# Altium PCB GY-G11.PCBDOC (part 3 of 7)
Units mm, origin at the board's own origin, x right, y up, seen from the top; angles counter-clockwise.
Board outline 170.4 x 114.15 mm, 2 copper layers (Top Layer, Bottom Layer); 364 components, 260 nets, 1285 pads, 753 vias.
Unrouted connection lines stored in the file: 2.
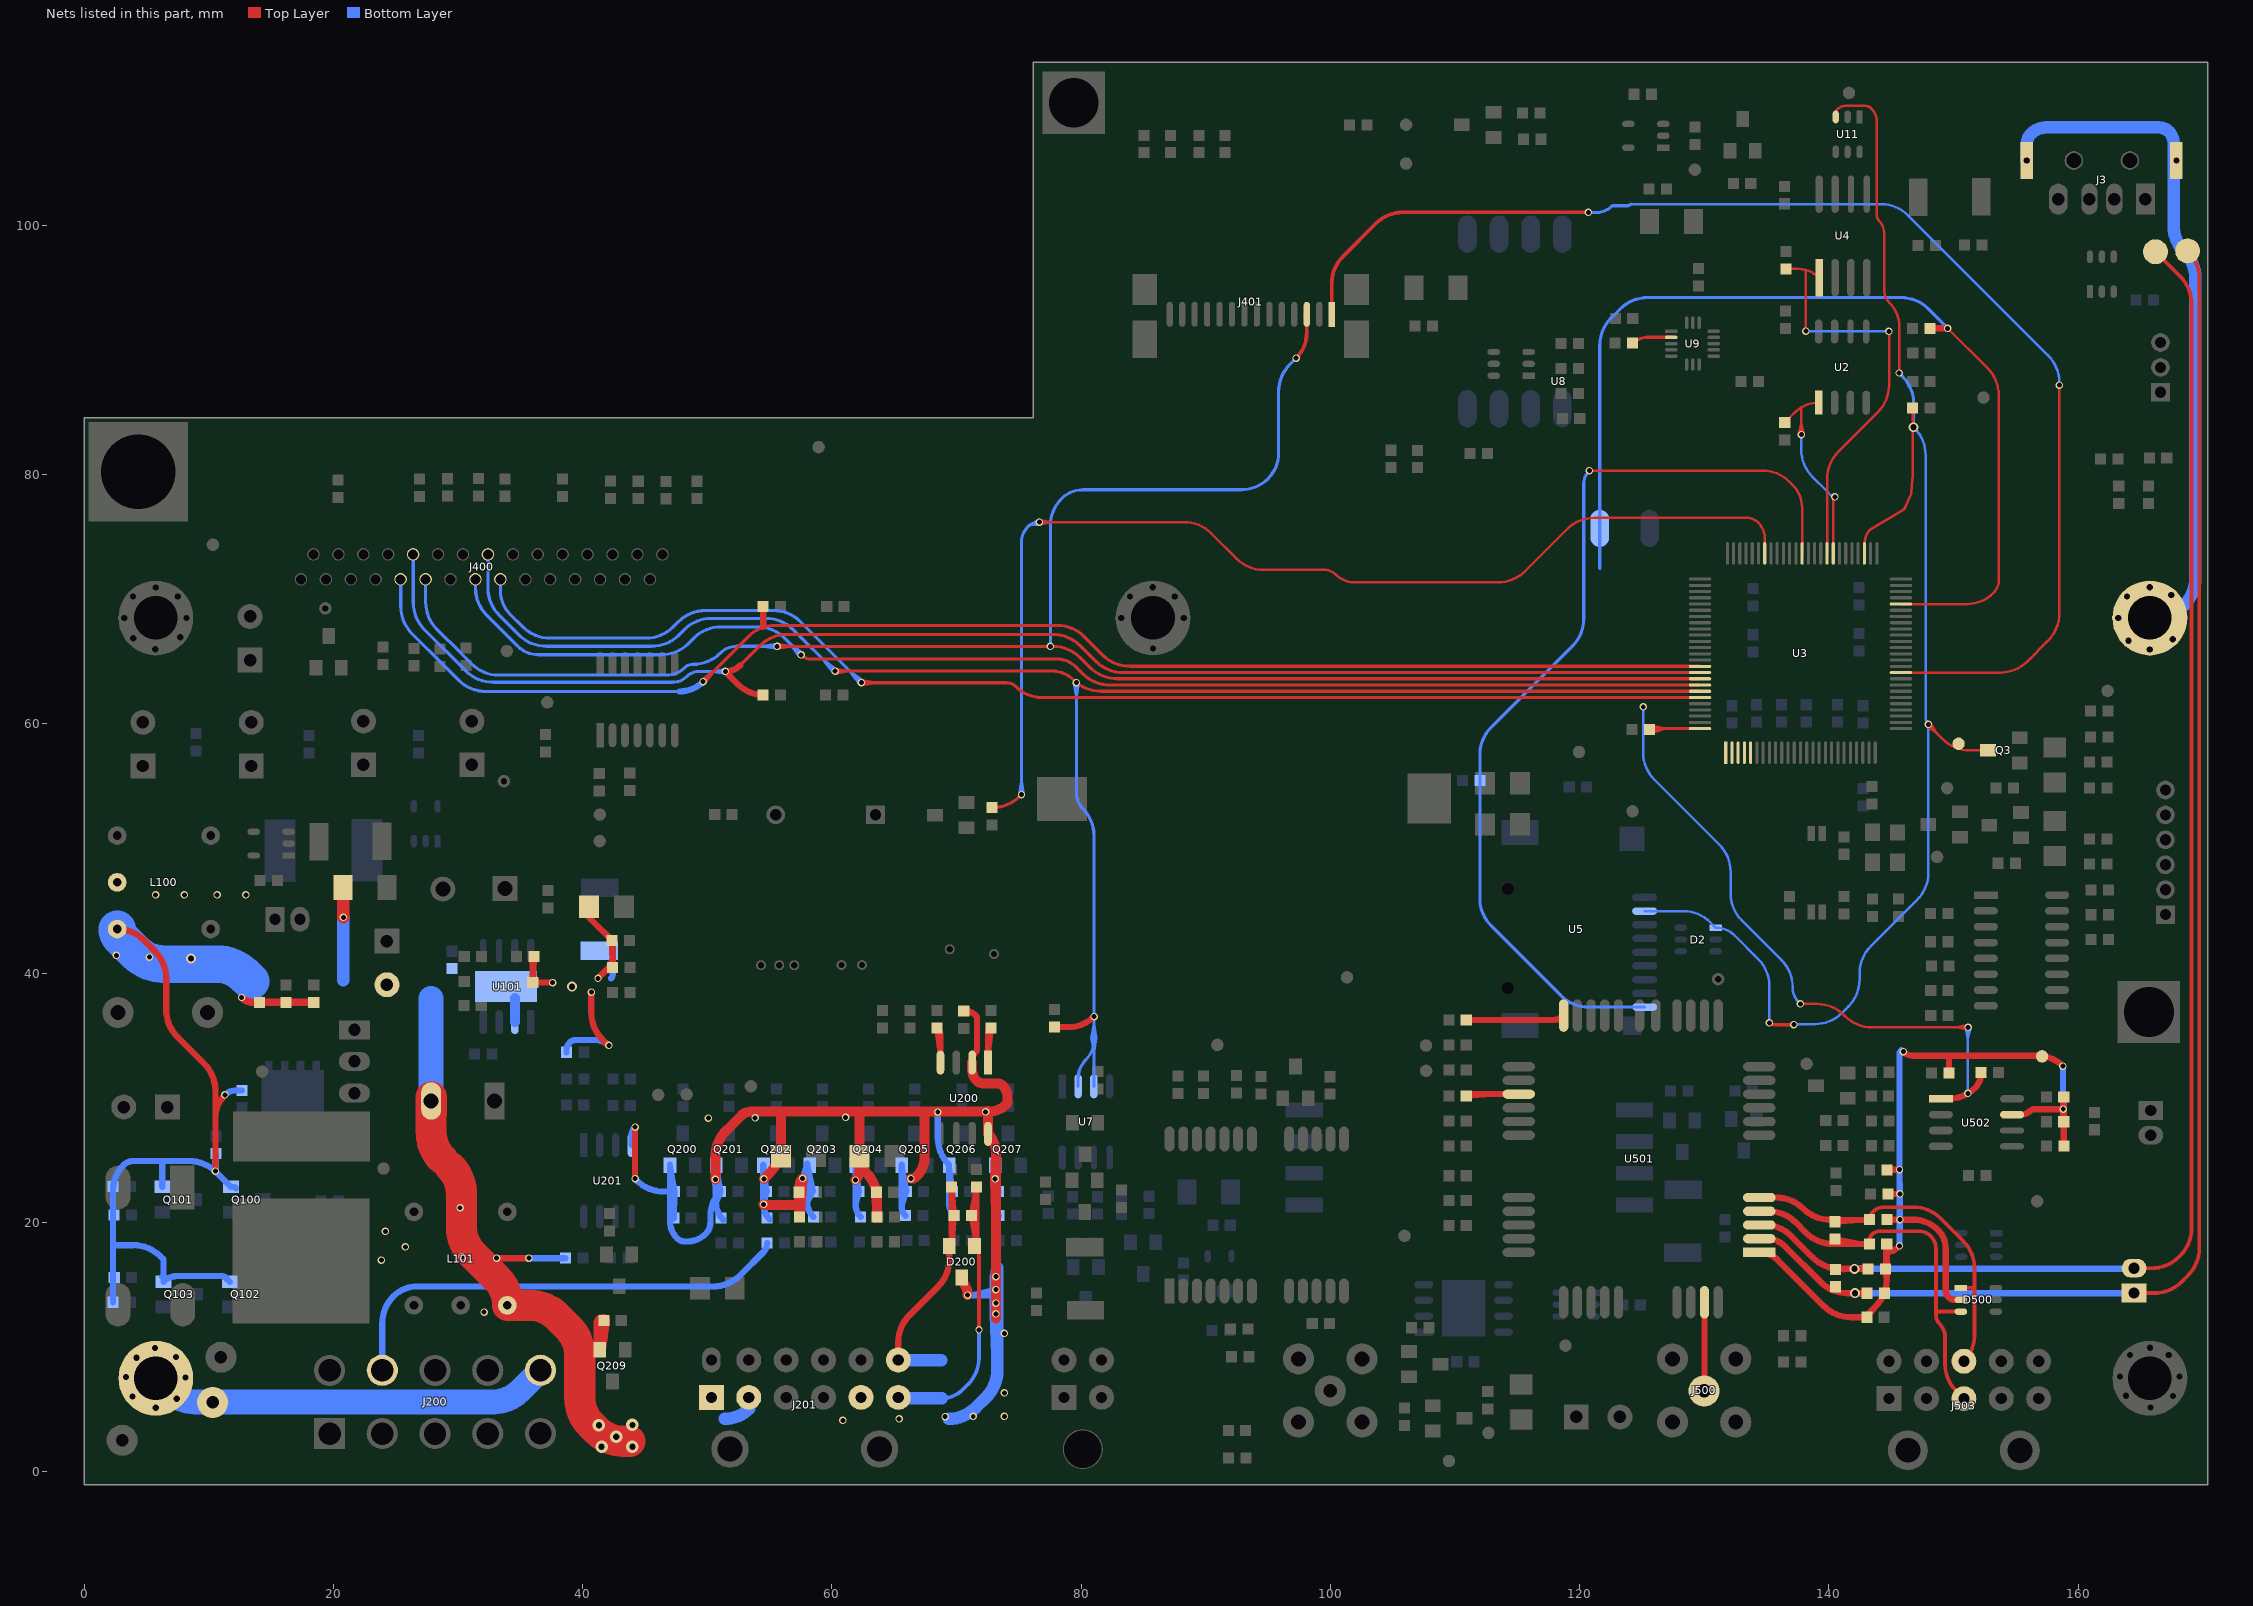
[diagram p3: the nets of this part, all layers, seen from the top]

## Via types
v1: diameter 0.6, hole 0.4, Top Layer to Bottom Layer, 620 vias
v2: diameter 0.8, hole 0.5, Top Layer to Bottom Layer, 121 vias
v3: diameter 1, hole 0.5, Top Layer to Bottom Layer, 10 vias
v4: diameter 1.27, hole 0.711, Top Layer to Bottom Layer, 2 vias

## Nets (pads, with @x,y where several pads share a name; then routed paths per layer and width w, separated by ;. In a path a pad name is that pad's centre, name@x,y a point inside that pad or via, vN(x,y) a via of type N, cw(c..) or ccw(c..) an arc to the next point about the centre after c; other vN are vias at no path point) (continued)
AGND: C101.1 C102.2 C103.2 C104.2 C105.2 C106.2 C116.1 C117.2 C119.2 C121.2 C200.2 C201.2 C202.2 C203.2 C204.2 C205.2 C206.2 C207.2 C208.2 C209.2 C210.2 D100.1 D200.3 D201.1 D202.1 D203.1 J201.1 J201.3 J201.9 L100.2 L100.5 L101.2 Q100.2 Q101.2 Q102.2 Q103.2 Q200.2 Q201.2 Q202.2 Q203.2 Q204.2 Q205.2 Q206.2 Q207.2 Q209.2 R100.1 R107.1 R109.1 R114.1 R115.1 R116.1 R117.1 R206.2 R223.1 R224.1 R225.1 R226.1 R227.1 R228.1 R229.1 R230.1 R231.1 R232.1 R233.1 R241.1 R242.2 U101.0 U101.2 U200.2 U200.8 U201.4 | length 500.8
  Top Layer w0.5: L100.2@2.648,43.544 cw(c2.648,40.558) 4.76,42.669 5.681,41.748 cw(c3.513,39.58) 6.579,39.58 6.579,37.06 ccw(c9.645,37.06) 7.477,34.892 9.631,32.738 cw(c7.463,30.57) 10.529,30.57 v1(10.529,24.11) ; 10.529,28.395 cw(c13.124,28.395) v1(11.289,30.23) ; 28.38,25.72 cw(c28.667,25.433) 28.667,25.839 ; 32.36,17.08 cw(c32.481,16.959) 32.481,17.13 v1(35.68,17.13) ; R107.1@35.994,39.387 R100.1@36.094,41.346 ccw(c36.335,41.105) 35.994,41.105 R107.1@35.994,39.246 ; R100.1@36.086,41.189 R107.1@35.994,39.246 ; v1@37.57,39.246 R107.1@35.994,39.246 ; v1(37.58,39.25) R107.1@35.994,39.246 ; D201.1@40.5,45.322 40.5,44.483 42.406,42.578 42.406,41.46 cw(c40.709,41.46) 41.909,40.26 v1(41.229,39.58) ; v1(40.689,38.48) 40.689,36.84 ccw(c43.755,36.84) 41.587,34.672 42.023,34.235 ccw(c42.109,34.321) v1(42.109,34.2) ; 40.856,44.128 C200.2@42.361,42.622 R224.1@42.406,40.676 ; C200.2@42.366,42.398 R224.1@42.406,40.454 ; v1(44.199,23.51) v1(44.199,27.64) ; C116.1@70.578,36.958 70.699,36.958 cw(c70.699,35.769) 71.54,36.61 cw(c71.274,36.344) 71.561,36.587 cw(c71.274,36.344) 71.65,36.344 71.65,33.954 cw(c71.206,33.954) 71.52,33.64 ccw(c72.174,32.986) 71.249,32.986 U200.2@71.249,32.823
  Top Layer w0.6: v1(12.64,38.05) ccw(c13.578,38.988) 13.578,37.661 18.375,37.661 cw(c18.375,37.594) C101.1@18.422,37.642 ; C101.1@18.422,37.642 C106.2@16.178,37.661 C101.1@18.422,37.642
  Top Layer w0.8: v1(50.64,23.45) 50.64,25.22 cw(c53.706,25.22) 51.538,27.388 52.74,28.59 cw(c53.473,27.857) 53.473,28.894 72.603,28.894 ccw(c72.603,30.827) 73.97,29.46 ccw(c73.729,29.701) 74.07,29.701 74.07,30.149 ccw(c72.909,30.149) 73.73,30.97 ccw(c73.32,30.56) 73.705,30.993 ccw(c73.32,30.56) 73.32,31.14 72.246,31.14 cw(c72.246,32.096) 71.57,31.42 cw(c72.345,32.195) 71.249,32.195 U200.2@71.249,32.823 ; v1(54.53,23.49) 55.002,23.962 ccw(c52.834,26.13) D203.1@55.9,26.13 ; D203.1@55.9,25.322 55.9,28.87 cw(c55.933,28.87) 55.91,28.894 ; 57.216,21.4 v1(54.51,21.45) ccw(c54.631,21.571) 54.631,21.4 57.406,21.4 ; v1@57.62,23.294 R227.1@57.406,20.454 ; v1(61.89,23.39) ccw(c61.141,24.139) 62.2,24.139 62.2,28.822 cw(c62.301,28.822) 62.23,28.894 ; D202.1@62.2,24.56 62.708,24.052 cw(c60.54,21.884) 63.606,21.884 ; 65.787,28.894 v1(68.49,28.85) 71.193,28.894 ; v1(66.34,23.51) ccw(c66.34,24.162) 66.801,23.701 ccw(c65.282,25.22) 67.43,25.22 67.43,28.894 ; D200.3@70.45,15.26 cw(c69.388,14.198) v1@70.89,14.198 ; v1@72.5,28.94 cw(c72.454,28.894) 72.519,28.894 U200.8@72.519,27.108 cw(c70.972,25.561) 73.16,25.561 ; v1(73.16,12.66) 73.16,12.348 ; v1@73.16,12.96 v1(73.16,15.66) ; v1(73.16,13.52) 73.16,12.348 ; v1(73.16,14.61) 73.16,12.348 ; 73.16,20.784 v1(73.096,23.49) 73.16,25.561 ; 73.18,12.3 cw(c73.228,12.348) 73.16,12.348 ; C202.2@57.361,22.422 R227.1@57.406,20.454 ; C202.2@57.361,22.422 57.406,22.965 ; C202.2@57.361,22.422 v1(57.64,23.53) ; C202.2@57.361,22.422 57.406,20.763 v1(57.64,23.53) ; C202.2@57.361,22.422 v1(57.64,23.53) ; C202.2@57.361,22.422 R227.1@57.406,20.454 ; C202.2@57.361,22.422 57.406,22.965 ; R227.1@57.406,20.454 57.406,22.965 ; 57.406,22.965 cw(c58.205,22.965) v1(57.64,23.53) ; 57.406,22.965 v1(57.64,23.53) ; 63.606,21.884 C201.2@63.561,22.422 R226.1@63.606,20.454 63.606,21.884 ; 73.16,12.348 73.16,25.561
  Top Layer w1: v1@20.786,44.513 C117.2@20.786,46.878 v1(20.8,44.48) ; R206.2@41.46,12.12 ccw(c41.665,11.915) 41.375,11.915 Q209.2@41.375,9.789 R206.2@41.697,12.146
  Top Layer w2: 28.738,25.082 29.372,24.448 ; L101.2@33.956,13.348 L101.2@33.99,13.36
  Top Layer w2.5: C119.2@27.849,30.07 27.848,29.75 27.84,27.25 ccw(c30.906,27.25) 28.738,25.082 ; 29.372,24.448 cw(c27.204,22.28) 30.27,22.28 30.27,19.62 ccw(c33.336,19.62) 31.168,17.452 33.092,15.528 cw(c30.924,13.36) L101.2@33.99,13.36 ; L101.2@33.956,13.348 35.772,13.348 cw(c35.772,10.282) 37.94,12.45 38.862,11.528 cw(c36.694,9.36) 39.76,9.36 39.76,5.94 ccw(c42.826,5.94) 40.658,3.772 41.082,3.348 ccw(c43.25,5.516) 43.25,2.45 v3@43.78,2.45
  Bottom Layer w0.5: R116.1@2.315,13.596 2.315,22.559 cw(c5.23,22.559) 3.169,24.62 cw(c3.917,23.872) 3.917,24.93 8.422,24.93 cw(c8.422,21.864) 10.59,24.032 Q100.2@11.768,22.854 11.904,22.854 cw(c11.904,22.466) Q100.2@12.179,22.74 ; 2.315,18.18 3.949,18.18 cw(c3.949,15.114) 6.117,17.282 6.319,17.08 cw(c6.185,16.946) 6.374,16.946 Q103.2@6.374,15.247 cw(c7.468,14.153) 7.468,15.7 10.998,15.7 cw(c10.998,15.16) 11.38,15.542 Q102.2@11.674,15.247 ; 6.159,24.93 cw(c5.895,24.666) 6.268,24.666 Q101.2@6.268,22.854 ; Q103.2@6.269,15.65 cw(c6.014,15.395) Q103.2@6.374,15.395 ; v1(10.529,24.11) ccw(c10.444,24.195) 10.564,24.195 R117.1@10.564,25.522 ; v1(11.289,30.23) cw(c12.179,29.34) 12.179,30.599 C103.2@12.666,30.599 ; C102.2@30.111,23.221 30.111,21.295 ccw(c30.274,21.295) v1(30.159,21.18) ; U101.0@34.55,38.05 cw(c34.52,38.02) U101.0@34.563,38.02 ; 36.683,17.135 R241.1@38.628,17.135 35.693,17.135 ccw(c35.693,17.117) v1(35.68,17.13) 37.48,17.135 ; R242.2@38.697,33.654 38.697,33.78 cw(c39.659,33.78) 38.979,34.46 cw(c39.389,34.05) 39.389,34.63 41.071,34.63 cw(c41.071,33.162) v1(42.109,34.2) ; 42.28,39.59 ccw(c41.976,39.894) 42.406,39.894 D100.1@42.406,41.53 ; U201.4@43.911,26.206 43.911,26.946 cw(c44.893,26.946) v1(44.199,27.64) ; v1(44.199,23.51) 44.333,23.376 ccw(c46.501,25.544) 46.501,22.478 C203.2@47.361,22.478 ; R223.1@46.996,20.444 C203.2@47.361,22.478 ; C203.2@46.996,22.348 R223.1@47.306,20.346 C203.2@47.345,22.386 ; Q200.2@46.996,24.508 C203.2@47.361,22.478 ; Q200.2@46.996,24.624 46.996,20.145 ccw(c49.025,20.145) 47.59,18.71 ccw(c48.145,19.265) 48.145,18.48 48.44,18.48 ccw(c48.44,20.46) 49.84,19.06 49.861,19.081 ccw(c48.922,20.02) 50.25,20.02 50.25,20.519 cw(c53.02,20.519) C204.2@51.061,22.478 ; Q201.2@50.696,24.508 C204.2@51.061,22.478 ; R225.1@51.28,20.2 cw(c52.691,21.611) 50.696,21.611 ; Q202.2@54.496,24.469 C205.2@54.761,22.478 ; R228.1@55.01,20.24 cw(c56.252,21.482) v1@54.496,21.482 ; Q203.2@58.02,24.546 C206.2@58.461,22.478 ; R229.1@58.506,20.446 cw(c59.679,21.619) 58.02,21.619 ; Q204.2@61.896,24.469 C207.2@62.161,22.478 ; R230.1@62.306,20.446 cw(c63.296,21.436) 61.896,21.436 ; Q205.2@65.596,24.508 C208.2@65.961,22.478 65.596,21.295 ; Q205.2@65.596,24.624 65.596,21.295 ; R231.1@65.906,20.546 cw(c66.655,21.295) 65.596,21.295 ; v1(68.49,28.85) 68.49,26.8 ccw(c71.556,26.8) 69.388,24.632 69.396,24.624 69.396,21.536 ; Q206.2@69.396,24.469 C209.2@69.661,22.478 69.396,21.536 ; R232.1@69.806,20.546 cw(c70.796,21.536) 69.396,21.536 ; v1(70.89,14.16) 72.691,14.14 ; v1@70.938,14.14 73.27,14.14 v1(73.16,14.61) v1@71.155,14.14 ; Q207.2@73.096,24.469 C210.2@73.361,22.478 73.096,21.295 ; Q207.2@73.096,24.624 73.096,21.295 ; R233.1@73.406,20.546 cw(c74.155,21.295) 73.096,21.295 ; v1(50.64,23.45) C204.2@51.061,22.478 ; v1(50.64,23.45) 50.696,21.646 C204.2@51.061,22.478 ; v1(50.64,23.45) 50.696,24.624 50.696,21.611 ; 50.696,21.611 C204.2@51.061,22.478 ; v1@54.496,21.482 C205.2@54.761,22.478 ; v1@54.496,21.482 54.496,24.624 v1(54.53,23.49) ; v1(54.53,23.49) C205.2@54.761,22.478 ; v1(54.53,23.49) C205.2@54.761,22.478 ; v1(54.53,23.49) 54.496,21.689 C205.2@54.761,22.478 ; v1(54.53,23.49) 54.508,21.682 C205.2@54.761,22.478 ; C205.2@54.761,22.478 54.496,23.25 v1(54.51,21.45) C205.2@54.761,22.478 ; v1(57.64,23.53) C206.2@58.461,22.478 ; v1(57.64,23.53) 58.02,21.619 ; v1(57.64,23.53) 58.02,24.74 58.02,21.619 ; 58.02,21.619 C206.2@58.461,22.478 ; 58.02,21.619 C206.2@58.461,22.478 ; v1(61.89,23.39) C207.2@62.161,22.478 ; v1(61.89,23.39) 61.896,21.59 C207.2@62.161,22.478 ; v1(61.89,23.39) 61.896,24.624 61.896,21.436 ; 61.896,21.436 C207.2@62.161,22.478 ; 65.596,23.43 v1(66.34,23.51) cw(c66.147,23.703) 66.147,23.43 65.596,23.43
  Bottom Layer w0.8: U101.2@34.563,36.078 U101.0@34.563,38.02
  Bottom Layer w1: 20.8,39.434 v1(20.8,44.48) ; 51.382,4.24 ccw(c51.382,7.06) J201.3@53.376,5.066 ; J201.3@53.327,5.964 cw(c53.334,5.964) J201.3@53.329,5.969 ; 69.37,4.24 ccw(c69.37,7.306) 71.538,5.138 72.372,5.972 ccw(c70.204,8.14) 73.27,8.14 73.27,16.38 ; 73.27,9.343 v1(73.16,12.66) ; 73.27,10.203 v1(73.16,13.52) ; 73.27,11.292 v1(73.16,14.61) ; 73.27,12.342 v1(73.16,15.66) ; v1(73.16,12.66) v1(73.16,15.66) ; v1(73.16,12.66) v1(73.16,14.61) ; v1(73.16,12.66) v1(73.16,13.52) ; v1(73.16,12.66) 73.27,15.977 ; v1(73.16,13.52) v1(73.16,15.66) ; v1(73.16,13.52) v1(73.16,15.66) ; v1(73.16,13.52) v1(73.16,14.61) ; v1(73.16,13.52) v1(73.16,14.61) ; v1(73.16,13.52) 73.27,15.977 ; v1(73.16,13.52) 73.27,16.38 ; v1(73.16,14.61) v1(73.16,15.66) ; v1(73.16,14.61) v1(73.16,15.66) ; v1(73.16,14.61) v1(73.16,15.66) ; v1(73.16,14.61) v1(73.16,15.66) ; v1(73.16,14.61) 73.27,16.38 ; v1(73.16,14.61) 73.27,16.38 ; v1(73.16,14.61) 73.27,15.977 ; v1(73.16,14.61) 73.27,15.977 ; v1(73.16,15.66) 73.27,16.38 ; v1(73.16,15.66) 73.27,16.38 ; v1(73.16,15.66) 73.27,15.977 ; v1(73.16,15.66) 73.27,15.977 ; v1(73.16,15.66) 73.27,16.38 ; v1(73.16,15.66) 73.27,16.38 ; v1(73.16,15.66) 73.27,15.977 ; v1(73.16,15.66) 73.27,15.977
  Bottom Layer w2: C119.2@27.84,29.75 27.84,37.979
  Bottom Layer w3: L100.2@2.648,43.544 ccw(c3.619,43.544) 2.933,42.857 4.144,41.646 ccw(c6.355,43.857) 6.355,40.73 10.665,40.73 cw(c10.665,37.603) 12.876,39.814 13.35,39.34
  other v1: 60.869,4.11 65.389,4.24 69.089,4.42 71.339,4.44 73.84,4.44 73.839,6.32 73.839,11.1 32.089,12.81 23.839,16.98 33.089,17.14 30.339,17.24 25.779,18.039 24.169,19.289 50.089,28.38 53.839,28.4 61.089,28.43 72.339,28.88 5.229,41.289 2.589,41.43 5.73,46.28 8.03,46.289 10.66,46.289 12.97,46.289
  other v2: 39.139,38.92 8.579,41.18
  other v3: 41.52,2.01 43.99,2 42.69,2.81 41.3,3.73 43.99,3.75
ANTGSM: J500.1 U501.39 | length 7.6
  Top Layer w0.5: J500.1@129.987,5.988 ccw(c129.932,6.043) 130.01,6.043 U501.39@130.01,13.598
AUDIOGND: C508.1 C510.2 C511.1 C513.2 C514.2 C515.1 C516.1 C518.2 C521.2 C523.2 D500.2 L504.2 pad.39 U501.1 U502.7 | length 112.7
  Top Layer w0.2: 149.534,33.38 cw(c147.587,31.229) 149.639,33.28
  Top Layer w0.5: U501.1@134.41,17.598 cw(c134.41,15.491) 135.899,16.981 139.59,13.29 ccw(c141.758,15.458) 141.758,12.392 L504.2@143.037,12.392 ; C518.2@144.639,16.333 C510.2@144.639,18.278 144.639,15.429 ; 144.639,17.64 ccw(c144.639,18.923) 145.546,18.016 v1(145.66,18.13) ; C510.2@144.639,18.229 C518.2@144.539,16.278 ; C510.2@144.639,18.23 C518.2@144.539,16.278 ; v1@145.642,24.222 C511.1@144.658,24.222 v1(145.66,24.23) ; v1@145.67,22.278 C513.2@144.739,22.278 v1(145.7,22.29) ; v1(145.969,33.7) ccw(c146.741,34.473) 146.741,33.38 156.742,33.38 cw(c156.742,30.512) v1(158.77,32.54) ; C523.2@149.639,31.978 149.639,33.28 ; D500.2@150.588,13.793 150.061,13.793 cw(c150.061,14.431) 149.61,13.98 cw(c150.189,14.559) 149.37,14.559 149.37,17.917 ccw(c147.287,17.917) 148.76,19.39 ccw(c146.75,17.38) 146.75,20.222 ; U502.7@154.692,28.649 155.442,28.649 ccw(c155.442,29.608) 156.12,28.93 cw(c156.506,28.544) 156.506,29.09 v1(158.8,29.09) ; 157,29.09 v1(158.8,29.09) ; C521.2@158.839,28.067 C515.1@158.858,26.122 cw(c158.906,26.17) C515.1@158.839,26.17 ; C521.2@158.839,28.133 C514.2@158.839,30.078 ; C514.2@158.839,30.022 C521.2@158.839,28.078 ; C515.1@158.858,26.133 C521.2@158.839,28.078 ; L504.2@143.037,12.392 cw(c143.435,12.392) 143.153,12.673 143.741,13.261 ; L504.2@143.037,12.392 143.741,13.261 ; 143.741,13.261 ccw(c141.573,15.429) 144.639,15.429 ; C518.2@144.539,16.278 144.639,15.429 ; 146.75,20.222 C508.1@144.658,20.222 v1(145.69,20.23) 146.75,20.222 ; v1(158.8,29.09) C521.2@158.839,28.078 ; v1(158.8,29.09) C514.2@158.839,30.078 ; v1(158.8,29.09) 158.839,27.288 C521.2@158.839,28.078 ; v1(158.8,29.09) C514.2@158.839,30.078 ; C515.1@158.839,26.17 C521.2@158.839,28.078 ; C515.1@158.839,26.17 C514.2@158.839,30.078
  Bottom Layer w0.5: v1(145.66,18.13) 145.66,33.472 cw(c146.138,33.472) v1@145.8,33.81 ; v1@145.66,18.429 v1(145.69,20.23) v1@145.66,22.031 ; v1@145.66,20.488 v1(145.7,22.29) ; v1@145.66,24.093 v1(145.7,22.29) ; v1@145.686,20.475 v1(145.7,22.29) ; 158.77,30.892 v1(158.8,29.09) cw(c158.872,29.162) 158.77,29.162 v1(158.77,32.54)
BRAKEIN: J200.4 R216.1 | length 37.9
  Bottom Layer w0.5: J200.4@23.923,8.138 23.923,11.913 cw(c26.989,11.913) 24.821,14.081 cw(c26.726,12.175) 26.726,14.87 50.48,14.87 ccw(c50.48,17.936) 52.648,15.768 54.509,17.629 ccw(c53.792,18.346) R216.1@54.806,18.346
BUZZER: R21.1 U3.69 | length 94.6
  Top Layer w0.2: v1(76.65,76.2) 88.25,76.2 cw(c88.25,73.134) 90.418,75.302 92.452,73.268 ccw(c94.62,75.436) 94.62,72.37 99.484,72.37 cw(c99.484,71.004) 100.45,71.97 ccw(c101.899,73.419) 101.899,71.37 113.46,71.37 ccw(c113.46,74.436) 115.628,72.268 119.002,75.642 cw(c121.17,73.474) 121.17,76.54 133.397,76.54 cw(c133.397,75.208) 134.339,76.15 cw(c133.115,74.926) 134.846,74.926 U3.69@134.846,73.684 ; v1@76.672,76.001 77.55,76.2 v1@76.672,76.399
  Top Layer w0.254: R21.1@72.904,53.294 ccw(c72.904,56.36) 75.072,54.192 v1(75.21,54.33)
  Bottom Layer w0.2: v1@76.6,76.4 75.9,75.99 v1@76.69,76
  Bottom Layer w0.254: v1@75.038,54.344 75.21,55.392 v1@75.382,54.344 ; v1(75.21,54.33) 75.21,74.601 cw(c76.921,74.601) 75.292,75.126 cw(c76.921,74.601) 75.711,75.811 cw(c76.65,74.872) v1(76.65,76.2)
BYP: C12.2 U9.2 | length 3.2
  Top Layer w0.254: C12.2@124.339,90.578 cw(c125.421,89.495) 125.421,91.026 U9.2@127.45,91.026
CANH: D200.1 J201.11 L200.2 R236.1 | length 26.7
  Top Layer w0.3: D200.1@71.438,18.121 cw(c70.565,17.248) 71.44,18.119 cw(c70.565,17.248) 71.527,18.022 cw(c70.565,17.248) 71.8,17.248 v1(71.8,11.39)
  Top Layer w0.5: D200.1@71.42,17.88 ccw(c70.966,18.334) 71.527,18.022 ccw(c70.966,18.334) D200.1@71.529,18.025 ; D200.1@71.438,18.121 cw(c69.6,16.282) 71.44,18.119 cw(c69.6,16.282) D200.1@71.529,18.025 ; D200.1@71.608,18.492 R236.1@71.194,20.546 L200.2@71.608,22.602 ; L200.2@71.608,22.837 71.608,18.334 cw(c70.966,18.334) D200.1@71.529,18.025
  Bottom Layer w0.3: 68.81,5.89 ccw(c68.81,8.28) 70.5,6.59 70.902,6.992 ccw(c68.734,9.16) 71.8,9.16 v1(71.8,11.39)
  Bottom Layer w1: J201.11@65.327,5.964 ccw(c65.506,6.143) 65.506,5.89 68.81,5.89
CANL: D200.2 J201.12 L201.2 R236.2 | length 22.7
  Top Layer w0.5: J201.12@65.327,8.964 65.327,10.397 cw(c68.393,10.397) 66.225,12.565 68.508,14.848 ccw(c66.34,17.016) 69.406,17.016 D200.2@69.406,18.121 ccw(c68.919,18.608) D200.2@69.608,18.608 ; L201.2@69.608,22.516 R236.2@69.797,20.546 D200.2@69.608,18.608 ; L201.2@69.608,22.837 D200.2@69.608,18.608
  Bottom Layer w1: J201.12@65.327,8.964 ccw(c65.385,9.022) 65.385,8.94 68.78,8.94
CANRXD: R235.1 U200.4 | length 5.5
  Top Layer w0.5: U200.4@68.709,32.828 68.709,34.972 ; U200.4@68.709,33.61 R235.1@68.446,35.606 ; R235.1@68.446,35.606 cw(c67.812,34.972) 68.709,34.972 ; R235.1@68.446,35.606 68.709,34.972
CANTXD: R234.1 U200.1 | length 5.4
  Top Layer w0.5: U200.1@72.519,32.823 72.519,35.058 ; U200.1@72.519,33.622 R234.1@72.746,35.606 ; 72.519,35.058 cw(c73.293,35.058) R234.1@72.746,35.606 ; 72.519,35.058 R234.1@72.746,35.606
CSDF: R2.1 U3.59 U4.1 | length 34
  Top Layer w0.2: R2.1@136.546,96.506 137.541,96.506 cw(c137.541,94.143) U4.1@139.212,95.814 ; 138.12,96.4 cw(c138.072,96.352) 138.14,96.352 v1(138.14,91.52) ; U3.59@139.846,73.684 139.846,79.64 cw(c142.973,79.64) 140.762,81.852 143.904,84.994 ccw(c141.693,87.205) 144.82,87.205 144.82,91.452 ccw(c144.752,91.452) v1(144.8,91.5)
  Bottom Layer w0.2: v1(138.14,91.52) ccw(c138.188,91.568) 138.188,91.5 v1(144.8,91.5)
CSDISP: J401.1 U3.35 | length 104
  Top Layer w0.2: U3.35@145.776,64.124 153.752,64.124 ccw(c153.752,67.19) 155.92,65.022 157.581,66.682 ccw(c155.413,68.85) 158.479,68.85 v1(158.48,87.188)
  Top Layer w0.3: J401.1@100.101,92.87 100.101,95.34 cw(c103.167,95.34) 100.999,97.508 103.643,100.152 cw(c105.811,97.984) 105.811,101.05 v1(120.701,101.05)
  Bottom Layer w0.2: 124.105,101.71 144.178,101.71 cw(c144.178,98.644) 146.346,100.812 157.582,89.576 cw(c155.414,87.408) 158.48,87.408 v1(158.48,87.188)
  Bottom Layer w0.254: v1(120.701,101.05) 121.402,101.05 ccw(c121.402,102.689) 122.561,101.53 cw(c122.681,101.41) 122.681,101.58 123.793,101.58 ccw(c123.793,102.023) 124.105,101.71
CSFM: R1.1 U2.1 U3.58 | length 17.9
  Top Layer w0.2: R1.1@136.454,84.194 137.228,84.968 cw(c139.181,83.015) 137.78,85.395 ; v1@137.581,83.232 137.78,84.11 v1@137.979,83.232 ; v1(137.78,83.21) 137.78,85.395 ; U2.1@139.181,85.777 ccw(c139.181,83.015) 137.78,85.395 ; U3.58@140.346,73.684 140.346,77.92 cw(c140.77,77.92) v1(140.47,78.22)
  Bottom Layer w0.2: v1(137.78,83.21) 137.78,82.015 ccw(c140.907,82.015) 138.696,79.804 139.831,78.669 ; 139.831,78.669 140.146,78.354 ccw(c140.47,78.679) v1(140.47,78.22)
CSSD-ISPEN: D2.1 pad.3@150.4,58.41 Q3.3 R16.1 U3.53 U5.2 U11.3 | length 123.8
  Top Layer w0.2: U11.3@140.545,108.706 140.545,109.028 cw(c140.972,109.028) 140.67,109.33 cw(c141.298,108.702) 141.298,109.59 142.96,109.59 cw(c142.96,109.01) 143.37,109.42 cw(c142.235,108.285) 143.84,108.285 143.84,100.837 ccw(c144.557,100.837) 144.05,100.33 cw(c143.157,99.437) 144.42,99.437 144.42,94.838 ccw(c145.888,94.838) 144.85,93.8 cw(c142.943,91.893) 145.64,91.893 v1(145.64,88.16) ; U3.53@142.846,73.684 142.846,74.435 cw(c144.533,74.435) 143.157,75.412 cw(c144.533,74.435) 143.34,75.628 146.04,77.228 146.62,78.518 146.684,79.601 146.706,79.964 R16.1@146.706,85.354 ; v1@147.841,59.807 148.682,59.228 ; v1@148.126,60.085 148.682,59.228 ; Q3.3@152.736,57.888 151.292,57.888 cw(c151.292,60.954) 149.124,58.786 147.984,59.926 cw(c148.018,59.96) v1(147.97,59.96) 148.682,59.228
  Top Layer w0.254: v1(135.22,36.01) ccw(c135.558,36.348) 135.558,35.87 v1(137.19,35.87)
  Bottom Layer w0.2: U5.2@125.213,44.987 128.306,44.987 cw(c128.306,41.921) 130.474,44.089 D2.1@130.906,43.657 cw(c130.906,41.49) 132.438,43.022 134.322,41.138 cw(c132.154,38.97) 135.22,38.97 v1(135.22,36.01) ; v1(137.19,35.87) cw(c137.287,35.773) 137.287,35.91 138.87,35.91 ccw(c138.87,38.976) 141.038,36.808 141.562,37.332 ccw(c139.394,39.5) 142.46,39.5 142.46,40 cw(c145.526,40) 143.358,42.168 147.072,45.882 ccw(c144.904,48.05) 147.97,48.05 v1(147.97,59.96) cw(c148.477,60.467) 147.76,60.467 147.76,81.568 ccw(c144.694,81.568) 146.862,83.736 v2(146.79,83.808) cw(c146.794,83.805) v2@146.794,83.81
  Bottom Layer w0.254: v1(145.64,88.16) 145.892,87.908 cw(c143.724,85.74) 146.79,85.74 v2(146.79,83.808)
CTSM: R518.1 U501.23 | length 6.3
  Top Layer w0.5: 112.917,30.298 R518.1@110.894,30.146 cw(c111.26,29.78) 111.26,30.298 U501.23@115.11,30.298
DETIC_CARD: R13.1 U3.46 U8.9 | length 80.8
  Top Layer w0.2: U3.46@145.776,69.624 151.088,69.624 ccw(c151.088,72.582) 153.18,70.49 ccw(c152.118,71.552) 153.62,71.552 153.62,86.386 ccw(c150.554,86.386) 152.722,88.554 v1(149.53,91.746)
  Top Layer w0.5: R13.1@148.094,91.746 v1(149.53,91.746)
  Bottom Layer w0.254: 121.59,72.46 ccw(c121.541,72.509) 121.61,72.509 U8.9@121.61,75.698 ; U8.9@121.61,75.706 121.61,90.38 cw(c124.676,90.38) 122.508,92.548 123.272,93.312 cw(c125.44,91.144) 125.44,94.21 145.796,94.21 cw(c145.796,91.144) 147.964,93.312 v1(149.53,91.746)
DETSD: R6.1 U3.63 U5.9 | length 77.3
  Top Layer w0.2: v1(120.77,80.33) 134.66,80.33 cw(c134.66,77.264) 136.828,79.432 137.09,79.17 cw(c135.265,77.345) 137.846,77.345 U3.63@137.846,73.684
  Bottom Layer w0.254: 119.432,66.272 112.892,59.732 ccw(c115.06,57.564) 111.994,57.564 111.994,45.966 ccw(c115.06,45.966) 112.892,43.798 118.505,38.185 ccw(c120.673,40.353) 120.673,37.287 U5.9@125.213,37.287 ; 119.432,66.272 ccw(c117.264,68.44) 120.33,68.44 120.33,79.268 cw(c121.832,79.268) v1(120.77,80.33)
DRTCK: R7.1 U3.100 | length 7.7
  Top Layer w0.254: R7.1@125.615,59.863 126.81,59.624 ; R7.1@125.655,59.234 126.81,59.624 ; U3.100@129.656,59.624 125.782,59.624 ccw(c125.782,59.358) R7.1@125.594,59.546 126.81,59.624
DST1: D8.2 J400.22 U3.90 | length 116.8
  Top Layer w0.254: v1@49.547,63.521 50.499,64.229 v1@49.791,63.277 ; v1(49.66,63.39) 53.282,67.012 cw(c55.45,64.844) 55.45,67.91 78.079,67.91 cw(c78.079,64.844) 80.247,67.012 81.737,65.522 ccw(c83.905,67.69) 83.905,64.624 U3.90@129.656,64.624
  Top Layer w0.5: D8.2@54.484,69.43 54.484,67.785 ccw(c54.505,67.785) 54.49,67.77
  Bottom Layer w0.254: J400.22@25.4,71.6 25.4,69.43 ccw(c28.466,69.43) 26.298,67.262 28.929,64.631 30.052,63.508 ccw(c32.22,65.676) 32.22,62.61 47.777,62.61
  Bottom Layer w0.5: 47.777,62.61 ccw(c47.777,65.273) v1(49.66,63.39)
DST2: D9.2 J400.21 U3.91 | length 118.3
  Top Layer w0.254: 52.652,64.712 54.222,66.282 cw(c56.39,64.114) 56.39,67.18 77.749,67.18 cw(c77.749,64.114) 79.917,66.282 81.177,65.022 ccw(c83.345,67.19) 83.345,64.124 U3.91@129.656,64.124
  Top Layer w0.5: 52.652,64.712 cw(c51.44,65.924) v1(51.44,64.21) 52.498,63.152 ccw(c54.484,65.139) D9.2@54.484,62.33
  Bottom Layer w0.254: J400.21@26.4,73.6 26.4,69.75 ccw(c29.466,69.75) 27.298,67.582 30.642,64.238 ccw(c32.81,66.406) 32.81,63.34 47.234,63.34 ccw(c47.234,64.876) 48.32,63.79 cw(c49.334,62.776) 49.334,64.21 v1(51.44,64.21) ; v1@51.426,64.038 50.378,64.21 v1@51.426,64.382
DST3: J400.20 J401.3 U3.92 | length 157.2
  Top Layer w0.254: v1(55.61,66.22) 77.759,66.22 cw(c77.759,63.154) 79.927,65.322 80.727,64.522 ccw(c82.895,66.69) 82.895,63.624 U3.92@129.656,63.624 ; v1@55.624,66.048 56.672,66.22 v1@55.624,66.392
  Top Layer w0.3: v1(97.25,89.35) ccw(c95.197,91.403) 98.101,91.403 J401.3@98.101,92.57
  Top Layer w0.5: J401.3@98.101,92.57 J401.3@98.101,92.87
  Bottom Layer w0.254: J400.20@27.4,71.6 27.4,69.77 ccw(c30.466,69.77) 28.298,67.602 30.202,65.698 ; 30.204,65.696 31.082,64.818 ccw(c33.25,66.986) 33.25,63.92 46.731,63.92 ccw(c46.731,65.969) 48.18,64.52 cw(c48.808,63.892) 48.808,64.78 49.19,64.78 ; 48.9,64.8 ccw(c48.9,67.866) 51.068,65.698 cw(c52.352,64.414) 52.352,66.23 v1@55.61,66.23 ; v1@55.594,66.048 54.548,66.23 ; v1@55.598,66.393 54.548,66.23 ; v1(55.61,66.22) 54.548,66.23 ; v1(77.53,66.22) 77.53,75.92 cw(c80.596,75.92) 78.428,78.088 cw(c80.123,76.393) 80.123,78.79 92.83,78.79 ccw(c92.83,81.856) 94.998,79.688 ccw(c92.965,81.721) 95.84,81.721 95.84,86.67 cw(c98.906,86.67) 96.738,88.838 v1(97.25,89.35)
DST4: J400.16 U3.93 | length 107.4
  Top Layer w0.254: v1(57.52,65.54) ccw(c58.317,66.337) 58.317,65.21 78.048,65.21 cw(c78.048,63.059) 79.569,64.58 80.127,64.022 ccw(c82.295,66.19) 82.295,63.124 U3.93@129.656,63.124
  Bottom Layer w0.254: J400.16@31.4,71.6 31.4,70.9 ccw(c34.466,70.9) 32.298,68.732 34.802,66.228 ; v1@57.386,65.43 56.705,66.395 ; v1@57.636,65.668 56.705,66.395 ; 34.802,66.228 ccw(c36.439,67.865) 34.805,66.225 ; 34.802,66.228 ccw(c36.97,68.396) 34.805,66.225 ; 34.805,66.225 ccw(c36.439,67.865) 36.439,65.55 46.3,65.55 ccw(c46.3,68.616) 48.468,66.448 48.912,66.892 cw(c51.08,64.724) 51.08,67.79 54.04,67.79 cw(c54.04,64.724) 56.208,66.892 57.492,65.608 cw(c57.423,65.54) v1(57.52,65.54) 56.705,66.395
DST5: J400.15 R32.2 U3.94 U7.2 U7.3 | length 159.4
  Top Layer w0.254: v1(60.25,64.23) 61.312,64.24 ; v1@60.25,64.24 77.689,64.24 cw(c77.689,61.85) 79.379,63.54 79.397,63.522 ccw(c81.565,65.69) 81.565,62.624 U3.94@129.656,62.624 ; v1@60.262,64.403 61.312,64.24 ; v1@60.266,64.058 61.312,64.24
  Top Layer w0.5: R32.2@77.864,35.677 78.994,35.677 ccw(c78.994,38.556) v1(81.03,36.52)
  Bottom Layer w0.2: 80.38,33.06 ccw(c78.833,34.607) 81.021,34.607
  Bottom Layer w0.254: J400.15@32.4,73.6 32.4,70.9 ccw(c35.466,70.9) 33.298,68.732 34.902,67.128 ccw(c37.07,69.296) 37.07,66.23 45.54,66.23 ccw(c45.54,69.296) 47.708,67.128 48.152,67.572 cw(c50.32,65.404) 50.32,68.47 54.72,68.47 cw(c54.72,65.404) 56.888,67.572 60.095,64.365 60.216,64.244 ccw(c60.25,64.278) v1(60.25,64.23) 59.402,65.058 ; v1@60.12,64.115 59.402,65.058 ; v1@60.362,64.362 59.402,65.058 ; v1@79.446,63.296 79.62,62.248 ; U7.2@79.751,30.923 79.751,31.541 cw(c81.899,31.541) 80.38,33.06 ; v1@79.791,63.296 79.62,62.248 ; 80.848,34.786 81.021,33.738 81.193,34.786 ; 80.848,34.814 81.021,35.862 81.193,34.814 ; U7.3@81.021,30.923 81.021,51.068 ccw(c78.048,51.068) 80.15,53.17 cw(c81.43,54.45) 79.62,54.45 79.62,63.307 ccw(c79.616,63.307) v1(79.619,63.31) 79.62,62.248
DST6: J400.14 R504.2 U3.95 U502.1 | length 165.8
  Top Layer w0.2: v1(137.7,37.54) 139.03,37.54 cw(c139.03,34.474) 140.973,36.845 cw(c139.03,34.474) 141.198,36.642 141.282,36.558 ccw(c143.45,38.726) 143.45,35.66 v1(151.169,35.66) 150.269,35.66 ; v1@151.147,35.461 150.269,35.66 ; v1@151.147,35.859 150.269,35.66
  Top Layer w0.254: v1(62.37,63.31) 74.013,63.31 cw(c74.013,62.279) 74.742,63.008 ccw(c76.91,65.176) 76.781,62.113 ccw(c76.91,65.176) 76.91,62.11 80.319,62.11 ; v1@62.384,63.138 63.432,63.31 v1@62.384,63.482 ; 79.93,62.113 80.319,62.113 81.869,62.114 ; 80.847,62.11 81.86,62.11 ccw(c81.86,62.123) 81.869,62.114 ; 81.818,62.11 cw(c82.059,59.2) 81.869,62.114 ; 82.61,62.114 U3.95@129.656,62.124 ; 82.61,62.12 82.059,62.12 ccw(c82.059,59.2) 81.869,62.114
  Top Layer w0.5: U502.1@148.977,29.919 149.569,29.919 ccw(c149.569,32.985) 151.737,30.817 ccw(c150.627,31.927) 152.197,31.927 R504.2@152.197,32.046
  Bottom Layer w0.2: v1(125.099,61.37) 125.099,57.69 ccw(c128.165,57.69) 125.997,55.522 131.212,50.307 cw(c129.044,48.139) 132.11,48.139 132.11,46.4 ccw(c135.176,46.4) 133.008,44.232 136.192,41.048 cw(c134.024,38.88) 137.09,38.88 ccw(c138.852,38.88) 137.606,37.634 v1(137.7,37.54) ; v1@150.97,35.642 151.149,34.759 ; v1(151.149,30.36) v1@151.149,35.612 ; v1(151.169,35.66) 151.149,34.759 ; v1@151.367,35.633 151.149,34.759
  Bottom Layer w0.254: J400.14@33.4,71.6 33.4,70.687 ccw(c36.097,70.687) 34.19,68.78 35.182,67.788 ccw(c37.35,69.956) 37.35,66.89 45.1,66.89 ccw(c45.1,69.956) 47.268,67.788 47.682,68.202 cw(c49.85,66.034) 49.85,69.1 55.31,69.1 cw(c55.31,66.034) 57.478,68.202 v1(62.37,63.31) ; v1@62.239,63.197 61.531,64.149 v1@62.483,63.441
DTCK: U3.5
DTDI: U3.2
DTDO: U3.1
DTMS: U3.3
DTRM: R521.1 U501.20 | length 7.9
  Top Layer w0.5: R521.1@110.894,36.246 117.861,36.246 ccw(c117.861,37.447) U501.20@118.71,36.598
DTRST: U3.4
FGND: J200.10 pad.0@5.75,7.5 pad.1@8.12,7.55 pad.2@3.35,7.6 pad.3@5.69,9.92 pad.4@5.75,5.13 pad.5@3.88,6.04 pad.6@7.36,9.2 pad.7@4.19,9.14 pad.7@10.31,5.56 pad.8@7.43,5.86 | length 32.4
  Bottom Layer w2: pad.0@5.75,7.5 6.752,6.498 ccw(c8.92,8.666) 8.92,5.6 32.805,5.6 ccw(c32.805,8.666) 34.973,6.498 J200.10@36.613,8.138
FGND1: J3.5 J3.6 pad.0@165.75,68.51 pad.2@163.21,68.51 pad.2@165.75,65.97 pad.3@165.74,70.96 pad.7@163.91,70.23 pad.7@164.03,66.67 pad.7@167.47,70.35 pad.7@167.59,66.79 | length 55.5
  Bottom Layer w1: J3.5@155.878,105.212 155.878,106.545 cw(c157.045,106.545) 156.22,107.37 cw(c157.427,106.163) 157.427,107.87 166.417,107.87 cw(c166.417,106.607) 167.31,107.5 cw(c166.489,106.679) 167.65,106.679 167.65,100.01 ccw(c170.716,100.01) 168.548,97.842 cw(c166.491,95.785) 169.4,95.785 169.4,71.7 cw(c166.334,71.7) 168.502,69.532 pad.0@167.42,68.45 ; pad.0@165.75,68.51 pad.0@166.874,69.634
GMIC2+: C516.2 C517.1 MK500.1 pad.19@168.78,97.96 U501.2 | length 122.5
  Top Layer w0.3: MK500.1@164.48,14.334 166.124,14.334 ccw(c166.124,17.4) 168.292,15.232 168.822,15.762 ccw(c166.654,17.93) 169.72,17.93 169.72,95.75 ccw(c166.654,95.75) 168.822,97.918 pad.19@168.78,97.96
  Top Layer w0.5: U501.2@134.41,18.698 135.007,18.698 cw(c135.007,16.657) 136.45,18.1 139.33,15.22 ccw(c141.498,17.388) 141.498,14.322 ; 141.498,14.322 C516.2@143.061,14.322 141.498,14.322
  Bottom Layer w0.5: v2(142.09,14.322) 165.272,14.322 ccw(c165.272,14.348) MK500.1@165.29,14.33
GMIC2-: C517.2 C518.1 MK500.2 pad.19@166.2,97.89 U501.3 | length 124.5
  Top Layer w0.3: MK500.2@164.48,16.334 165.904,16.334 ccw(c165.904,19.4) 168.072,17.232 168.202,17.362 ccw(c166.034,19.53) 169.1,19.53 169.1,93.72 ccw(c166.034,93.72) 168.202,95.888 pad.19@166.2,97.89
  Top Layer w0.5: U501.3@134.41,19.798 134.822,19.798 cw(c134.822,16.732) 136.99,18.9 138.714,17.176 ccw(c140.882,19.344) 140.882,16.278 C518.1@143.142,16.278 ; C517.2@140.522,16.239 142.473,16.278 C518.1@143.142,16.278 ; 141.197,16.252 C518.1@143.142,16.278
  Bottom Layer w0.254: 162.53,16.278 MK500.2@164.212,16.278
  Bottom Layer w0.5: v2(142.06,16.278) MK500.2@164.5,16.278
GMIC+: C508.2 C509.1 D500.1 J503.6 U501.5 | length 34.1
  Top Layer w0.3: C508.2@143.261,20.222 cw(c144.152,20.222) 143.522,20.852 143.523,20.853 cw(c144.433,19.943) 144.433,21.23 146.79,21.23 cw(c146.79,18.164) 148.958,20.332 150.772,18.518 cw(c148.604,16.35) 151.67,16.35 151.67,10.899 cw(c148.792,10.899) J503.6@150.827,8.864 ccw(c150.071,9.62) J503.6@151.14,9.62 ; D500.1@150.612,14.759 151.623,14.759 cw(c151.623,14.693) 151.67,14.74
  Top Layer w0.5: U501.5@134.41,21.998 135.782,21.998 cw(c135.782,18.932) 137.95,21.1 ccw(c140.068,23.217) C509.1@140.068,20.222 ; C509.1@140.29,20.2 143.207,20.2 ccw(c143.207,20.277) C508.2@143.261,20.222 141.316,20.2 ; C509.1@140.478,20.058 142.433,20.2
GMIC-: C509.2 C510.1 D500.3 J503.5 U501.4 | length 33.1
  Top Layer w0.3: C510.1@143.242,18.278 143.242,18.569 cw(c143.851,18.569) 143.42,19 cw(c144.144,18.276) 144.144,19.3 147.218,19.3 cw(c147.218,17.968) 148.16,18.91 cw(c147.122,17.872) 148.59,17.872 148.59,12.535 ccw(c149.517,12.535) 148.862,11.879 cw(c147.755,10.773) 149.32,10.773 149.32,8.641 ccw(c152.386,8.641) 150.218,6.473 J503.5@150.827,5.864 ; 148.59,12.86 ccw(c148.603,12.873) 148.603,12.854 D500.3@150.612,12.854
  Top Layer w0.5: U501.4@134.41,20.898 135.162,20.898 cw(c135.162,17.832) 137.33,20 138.154,19.176 ccw(c140.322,21.344) C509.2@140.322,18.278 ; C509.2@140.478,18.278 C510.1@143.242,18.278 ; C509.2@140.478,18.661 142.526,18.278